# Altium PCB PCB3.PcbDoc
Units mil, origin at the board's own origin, x right, y up, seen from the top; angles counter-clockwise.
Board outline 6000 x 4000 mil, 2 copper layers (Top Layer, Bottom Layer); 55 components, 41 nets, 189 pads, 20 vias.
Unrouted connection lines stored in the file: 6.
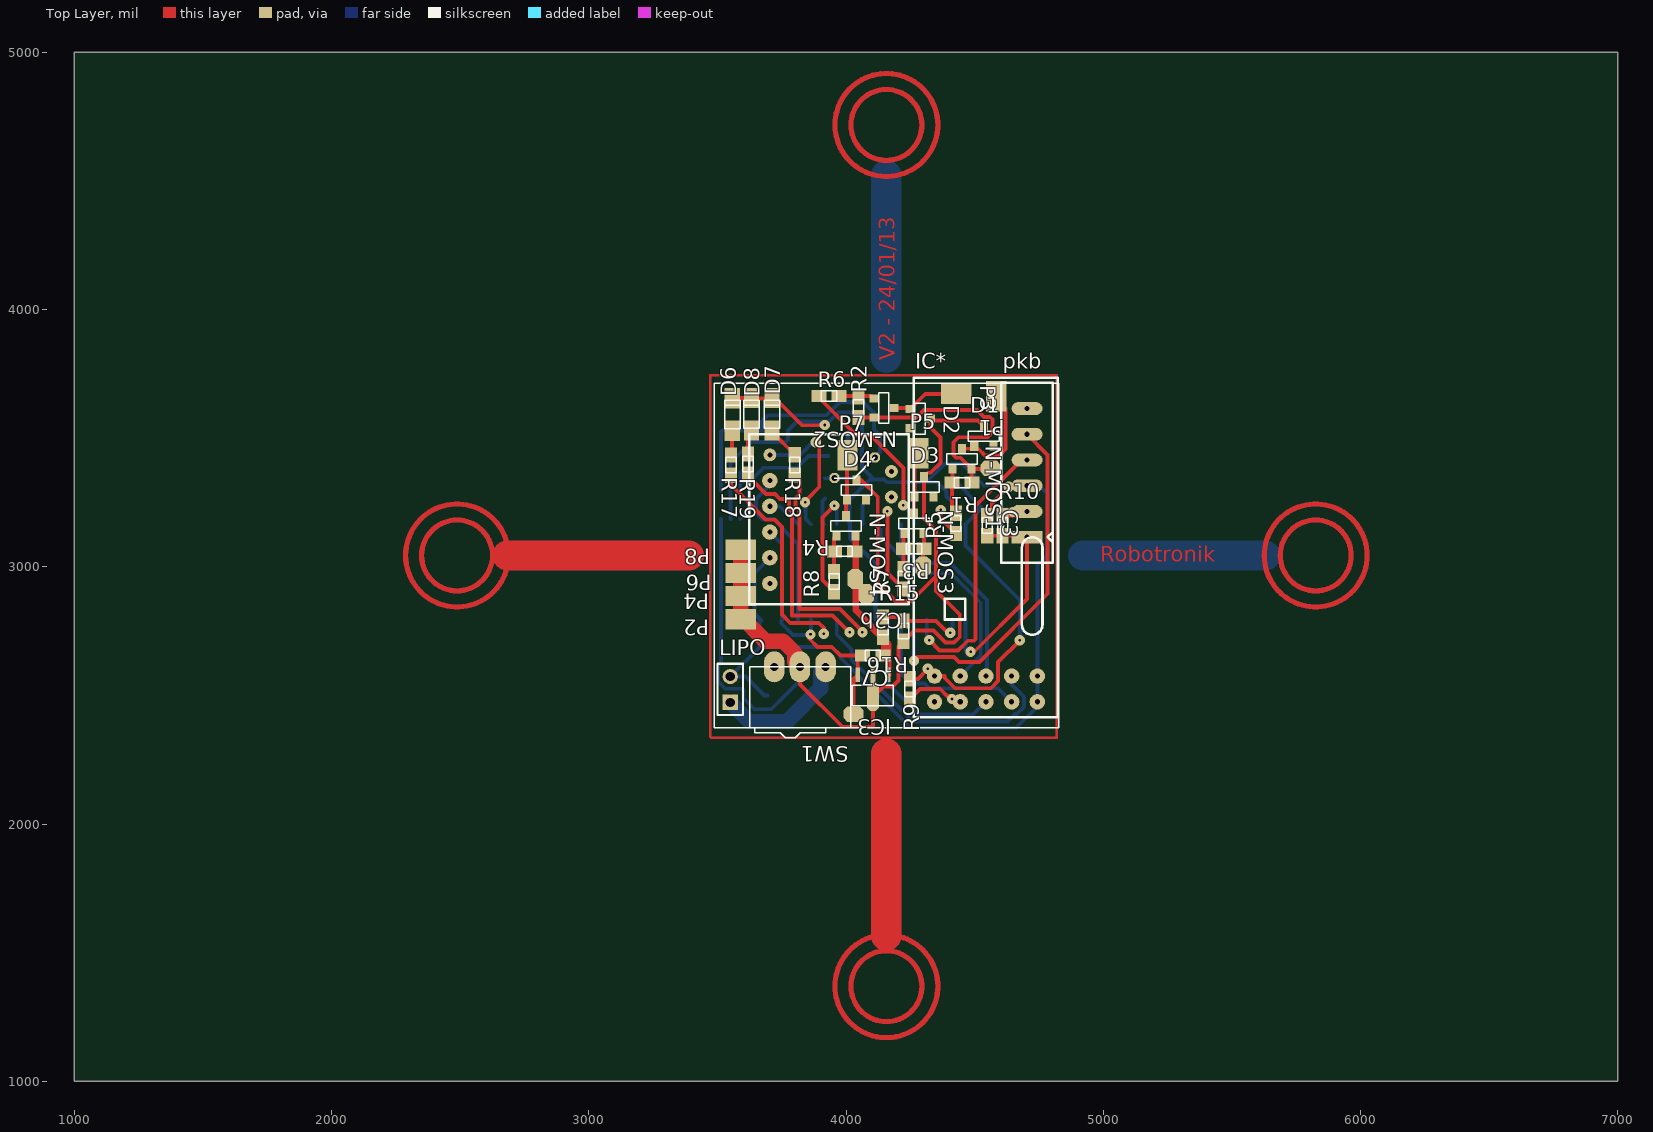
[diagram p0: Top Layer view]
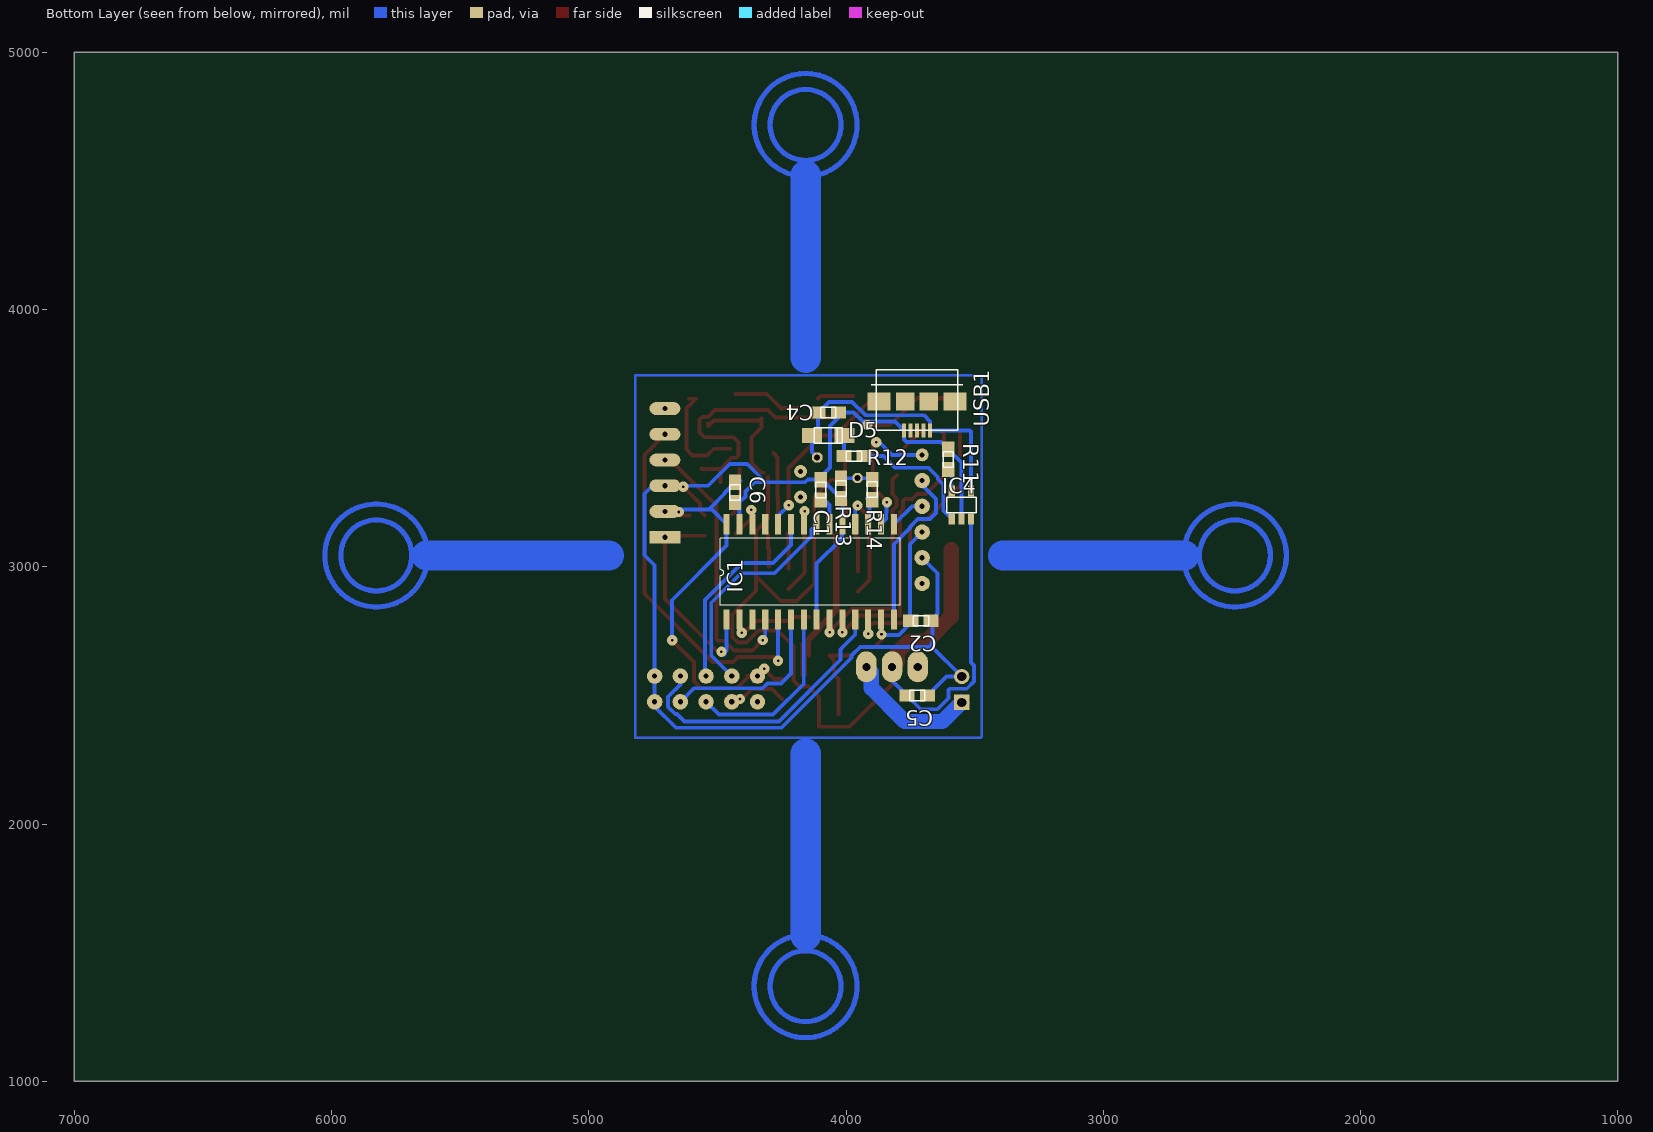
[diagram p1: Bottom Layer view, seen from below]

## Layer stack, top to bottom
Top Layer: signal copper 1.4
Dielectric: dielectric 12.6, FR-4, Dk 4.8
Bottom Layer: signal copper 1.4

## Board outline
1000,1000 7000,1000 7000,5000 1000,5000

## Design rules (kind name [scope] priority, off if disabled: settings)
Clearance [All] p1: gap=10
ComponentClearance [All] p1 off: gap=10 collisioncheckmode=3 verticalgap=10 showdistances=FALSE
PolygonConnect [All] p1: connectstyle=Relief reliefconductorwidth=10 reliefentries=4 polygonreliefangle="90 Angle"
RoutingVias [All] p1: holewidth=10 width=40 viastyle="Through Hole" minholewidth=10 minwidth=40 maxholewidth=10 maxwidth=40
SilkscreenOverComponentPads [All] p1: minsilkscreentomaskgap=10
SolderMaskExpansion [All] p1: expansion=4
Width [All] p1: maxlimit=15 minlimit=15 preferedwidth=15
26 further rules are at their usual default settings.

## Components (designator, comment, footprint, x,y, rotation, side; value= is the part's Value field where it differs from the comment)
C1 "TANTALE 10uf" cms805 4098,3299 r270 bottom
C2 "0.1uf ceramique" cms805 3709,2790 r0 bottom
C3 "1uf" cms805 4549,3160 r270 top
C4 "4.7uF" cms805 4069,3600 r0 bottom
C5 "4.7uF" cms805 3723,2499 r0 bottom
C6 "0.1uf ceramique" cms805 4431,3289 r270 bottom
C7 "1uF" cms805 4104,2655 r180 top
D1 "BAT54" SOT23 4536,3547 r0 top
D2 "BAT54" SOT23 4328,3576 r270 top
D3 "BAT54" SOT23 4303,3350 r0 top
D4 "BAT54" SOT23 4041,3338 r0 top
D5 "LED" cms1206 4069,3510 r180 bottom
D6 "LED" cms1206 3558,3592 r90 top
D7 "LED" cms1206 3712,3593 r90 top
D8 "LED" cms1206 3633,3593 r90 top
IC1 "dsPIC33FJ128MC802" SOIC28(300mil) 4464,2795 r90 bottom
IC2b "MPU6050" MPU6050_drotek 3704,2935 r180 top
IC3 "MCP1700" SOT89 4164,2580 r180 top
IC4 "MCP73831" SOT23-5 3549,3225 r180 bottom
IC* "NRF24L01" NRF24L01 4344,2475 r90 top
LIPO "Header 2" HDR1X2 3550,2473 r90 top
N-MOS1 "FD339" SOT23 4451,3459 r0 top
N-MOS2 "FD339" SOT23 4187,3617 r270 top
N-MOS3 "FD339" SOT23 4265,3208 r0 top
N-MOS4 "FD339" SOT23 4000,3199 r0 top
P1 "pad_moteur" PAD 4584,3663 r180 top
P2 "pad_moteur" PAD 3591,2796 r90 top
P3 "pad_moteur" PAD 4429,3672 r270 top
P4 "pad_moteur" PAD 3591,2886 r90 top
P5 "pad_moteur" PAD 4282,3442 r0 top
P6 "pad_moteur" PAD 3591,2976 r90 top
P7 "pad_moteur" PAD 4006,3434 r0 top
P8 "pad_moteur" PAD 3591,3066 r90 top
pkb "pickit3" pickit3 4704,3115 r90 top
R1 "10k" cms805 4451,3327 r180 top
R2 "10k" cms805 4049,3620 r90 top
R3 "10k" cms805 4264,3070 r180 top
R4 "10k" cms805 3995,3060 r180 top
R5 "330" cms805 4427,3169 r90 top
R6 "330" cms805 3934,3664 r0 top
R7 "330" cms805 4223,2953 r90 top
R8 "330" cms805 3954,2942 r90 top
R9 "10k" cms805 4249,2525 r90 top
R10 "10k" cms805 4609,3160 r90 top
R11 "4.7k" cms805 3602.36,3417.32 r270 bottom
R12 "150" cms805 3969,3430 r0 bottom
R13 "10k" cms805 4019,3305 r90 bottom
R14 "330" cms805 3898,3300 r270 bottom
R15 "17.25k" cms805 4144,2765 r90 top
R16 "4.7k" cms805 4224,2750 r270 top
R17 "65 + test" cms805 3553,3395 r270 top
R18 "65 + test" cms805 3801,3396 r270 top
R19 "65 + test" cms805 3619,3399 r270 top
SW1 "" inverseur 3921,2611 r180 top
USB1 "USB" USB_con 3724,3530 r0 bottom

## Footprints (in the part's own frame and the unit in brackets; to place one, negate y for a bottom-side part, rotate by r counter-clockwise, add the part's x,y. Pads: shape width x height; smd on the part's side, far side on the other; paste and mask are expansions set on the pad)
cms805 [mm]
  rect 1.5x1.2 smd: 1(-1,0) 2(1,0)
  silkscreen extent -0.76,-0.51 0.76,0.51
cms1206 [mm]
  rect 2x1.5 smd: 1(-1.6,0) 2(1.6,0)
  silkscreen extent -1.4,-0.76 1.4,0.76
HDR1X2 [mm] "Connector; Header; 2 Position"
  rect 1.5x1.5 hole 0.9: 1(0,0)
  round 1.5 hole 0.9: 2(2.54,0)
  silkscreen extent -1.27,-1.27 3.81,1.27
inverseur [mil]
  oval 80x120 hole 31.5: 1(0,0) 2(100,0) 3(200,0)
  silkscreen extent -98,0 295,276
MPU6050_drotek [mil]
  round 50 hole 20: 1(0,0) 2(0,-100) 3(0,-200) 4(0,-300) 5(0,-400) 6(0,-500) 7(-472.44,-335.83) 8(-472.44,-435.83)
  silkscreen extent -540,-580 80,80
NRF24L01 [mil]
  round 50 hole 20: 1(0,0) 2(0,-100) 3(0,-200) 4(0,-300) 5(0,-400) 6(100,-400) 7(100,-300) 8(100,-200) 9(100,-100) 10(100,0)
  silkscreen extent -60,-480 1260,80
PAD [mm]
  rect 2x3 smd: 1(0,0)
pickit3 [mil]
  rect 50x120 hole 20: 1(0,0)
  oval 50x120 hole 20: 2(100,0) 3(200,0) 4(300,0) 5(400,0) 6(500,0)
  silkscreen extent -100,-100 600,100
SOIC28(300mil) [mm]
  rect 2x0.6 smd: 1(0,0) 2(0,-1.27) 3(0,-2.54) 4(0,-3.81) 5(0,-5.08) 6(0,-6.35) 7(0,-7.62) 8(0,-8.89) 9(0,-10.16) 10(0,-11.43) 11(0,-12.7) 12(0,-13.97) 13(0,-15.24) 14(0,-16.51) 15(9.4,-16.51) 16(9.4,-15.24) 17(9.4,-13.97) 18(9.4,-12.7) 19(9.4,-11.43) 20(9.4,-10.16) 21(9.4,-8.89) 22(9.4,-7.62) 23(9.4,-6.35) 24(9.4,-5.08) 25(9.4,-3.81) 26(9.4,-2.54) 27(9.4,-1.27) 28(9.4,0)
  silkscreen extent 1.38,-17.14 8,0.63
SOT23 [mm]
  rect 0.8x0.9 smd: 1(-0.95,-2) 2(0,0) 3(0.95,-2)
  silkscreen extent -1.52,-1.52 1.52,-0.51
SOT23-5 [mm]
  rect 0.6x1.1 smd: 1(-1.016,-1.016) 2(-0.066,-1.016) 3(0.884,-1.016) 4(0.884,1.784) 5(-1.016,1.784)
  silkscreen extent -1.52,-0.38 1.4,1.14
SOT89 [mm]
  rect 0.48x1.4 smd: 1(0,0) 3(3,0)
  oct 1.2x2.7 smd: 2(1.5,2.2)
  rect 0.48x2 smd: 2(1.5,0.3)
  silkscreen extent -0.51,1.02 3.56,3.05
USB_con [mm]
  rect 2.3x1.8 smd: 0(-3.75,-2.85) 0(3.75,-2.85)
  rect 1.8x1.8 smd: 0(-1.15,-2.85) 0(1.15,-2.85)
  rect 0.4x1.4 smd: 1(-1.3,0) 2(-0.65,0) 3(0,0) 4(0.65,0) 5(1.3,0)
  silkscreen extent -4.5,-6 4.5,0

## Part data
C1 C2 C3 C4 C5 C6 C7: library part Capa
D1 D2 D3 D4: library part "Schottky BAT54"
IC2b: library part MPU6050-drotek
IC4: library part "MCP73831 Li-Po"
LIPO: "Header, 2-Pin"
N-MOS1 N-MOS2 N-MOS3 N-MOS4: library part "N-MOS FD339"
R1 R2 R3 R4 R5 R6 R7 R8 R9 R10 R11 R12 R13 R14 R15 R16 R17 R18 R19: library part Resistance
SW1: library part switch

## Free pads (board coordinates)
  round 60 hole 10: 0(3704,3335) 1(3704,3235) 2(3704,3135) 3(3704,3035) 4(3704,2935) 5(4344,2575) 6(4444,2575) 7(4544,2575) 8(4644,2575) 9(4744,2575) 10(4744,2475) 11(4644,2475) 12(4544,2475) 13(4444,2475) 14(4344,2475)
  oct 39.37x39.37 hole 23.62: 0(3955,3345) 2(4112,3425)
  oct 59.06x78.74 smd: 1(4036,2952) 1(4079,2893) 2(4300,3001)
  oct 78.74x59.06 smd: 2(4562,3383) 3(4029,2427)

## Via types
v1: diameter 40, hole 10, Top Layer to Bottom Layer, 20 vias

## Nets (pads, with @x,y where several pads share a name; then routed paths per layer and width w, separated by ;. In a path a pad name is that pad's centre, name@x,y a point inside that pad or via, vN(x,y) a via of type N, cw(c..) or ccw(c..) an arc to the next point about the centre after c; other vN are vias at no path point)
GND: C1.1 C2.1 C3.1 C4.1 C5.1 C6.2 C7.1 D6.2 D7.2 D8.2 IC1.8 IC1.19 IC1.27 IC2b.2 IC3.1 IC4.2 IC*.5 IC*.6 LIPO.2 N-MOS1.3 N-MOS2.3 N-MOS3.3 N-MOS4.3 pad.1@4036,2952 pad.1@4079,2893 pad.2@4300,3001 pad.2@4562,3383 pad.3@3704,3035 pad.9 pad.10 pkb.3 R1.1 R2.1 R3.1 R4.1 R11.1 R13.1 R15.1 USB1.5 | length 8506.4
  Top Layer w15: D8.2 3559,3655.99 D6.2 3557,3653.99 3710,3653.99 D7.2 3723.01,3655.99 3829,3550 3916.14,3550 v1(3917.32,3551.18) ; N-MOS4.3 4034.37,3117.23 R4.1 4034.37,2834 R15.1@4143.37,2725 ; R2.1 N-MOS2.3@4107.23,3580.63 ; N-MOS2.3 4273.67,3579.6 4292.78,3598.71 4292.78,3599 4303.03,3609.25 4509.11,3609.25 4535.91,3582.44 4558.77,3582.44 4569.25,3571.97 4569.25,3522.03 4550.69,3503.48 4437.26,3503.48 4417.75,3483.97 4417.75,3434.03 4428,3423.78 4444.88,3423.78 N-MOS1.3 ; C7.1 4143.37,2720.03 R15.1@4143.37,2725 ; R15.1 R15.1@4143.37,2725 ; pad.2@4300,3001 4300,3066.63 R3.1 N-MOS3.3@4303.37,3128.29 ; R1.1@4488.4,3328.97 N-MOS1.3 ; C3.1 4567.88,3218.25 4567.88,3246.4 4636.48,3315 pkb.3 ; pad.2@4562,3383 4559.26,3380.26 N-MOS1.3
  Top Layer w25: N-MOS4.3 4037.4,2831.7 4097.88,2771.23 ; 4106.5,2756.9 4143.37,2720.03 4164,2699.4 IC3.1
  Bottom Layer w15: IC4.2 3551.6,3405.93 R11.1 3630.61,3484.94 3764.71,3484.94 3774.96,3495.19 3774.96,3529.78 USB1.5 3809.45,3564.27 3934.52,3564.27 3970.25,3600 C4.1 4029.63,3580.02 4062.88,3546.78 4062.88,3385.49 C1.1@4109,3339.37 ; C2.1 3671,2791.37 C2.1@3663.68,2798.69 ; C5.1@3680,2499 C5.1 ; C5.1@3694.63,2499 C5.1 ; IC2b.2 3644,2975 3644,2818.37 C2.1@3663.68,2798.69 ; IC1.19 IC1.19@4014,3174 ; IC1.8 4114,3012 4016,3110 4016,3172 IC1.19@4014,3174 ; IC1.27 4414,3250.63 4390.83,3273.8 4390.83,3292.17 4354.67,3328.33 4312,3328.33 ; 3663.68,2701 3676.18,2688.5 3944.82,2688.5 3978.5,2654.82 3978.5,2646.14 4250.63,2374.02 4661.42,2374.02 4744,2456.6 IC*.5 IC*.6 4744,3006 4783,3045 4783,3284 4752,3315 pkb.3 4537,3315 4452,3400 4383.67,3400 4312,3328.33 ; 3663.68,2701 3663.68,2686.68 LIPO.2 3609.63,2573 C5.1 ; 3663.68,2701 C2.1@3663.68,2798.69 ; IC1.19@4014,3174 4014,3260.63 R13.1 4092.74,3339.37 C1.1@4109,3339.37 ; C1.1@4109,3339.37 4147.79,3339.37 4158.84,3328.33 4312,3328.33
  other v1: 4633,3311
NET1: IC1.6 IC*.4 pad.11 | length 700.6
  Bottom Layer w15: IC1.6 4214,2585 4253,2546 4305.82,2546 4324.32,2527.5 4591.5,2527.5 IC*.4 IC*.4@4644,2490
NET2: IC1.7 IC*.3 pad.12 | length 700.3
  Bottom Layer w15: IC1.7 4164,2545 4283.8,2425.2 4494.2,2425.2 IC*.3
NET3: IC1.21 IC*.9 pad.6 | length 869.2
  Bottom Layer w15: IC1.21 4134.69,3144.39 4134.69,3118.46 4278.15,2975 4408.64,2975 4523.62,2860.02 4523.62,2654.62 IC*.9
NET4: IC1.23 IC*.8 pad.7 | length 800.9
  Bottom Layer w15: IC1.23 4214,3085 4284,3015 4404,3015 4548.62,2870.38 4548.62,2579.62 IC*.8
NetC1_2: C1.2 IC1.20 | length 110.9
  Bottom Layer w15: IC1.20 4064,3240.63 C1.2@4089,3265.63
NetC3_2: C3.2 IC1.1 pkb.1 R10.1 | length 864.8
  Top Layer w15: v1@4482,2662 4491,2662 4704,2875 pkb.1 4698.37,3120.63 R10.1 C3.2
  Bottom Layer w15: IC1.1 4464,2675 4472,2667 4472,2658 4483.29,2669.29 v1(4484.25,2669.29)
NetD1_1: D1.1 N-MOS1.2 P1.1 | length 430.4
  Top Layer w15: N-MOS1.2 4514.2,3459 4540.15,3433.04 4553.96,3433.04 4555,3432 4556.04,3433.04 4596.4,3433.04 4620.36,3457 4620.36,3615.64 4583,3653 P1.1@4611,3653
NetD2_1: D2.1 N-MOS2.2 P3.1 | length 262.7
  Top Layer w15: N-MOS2.2 D2.1@4245.66,3617 ; D2.1 4307.86,3672 P3.1
NetD3_1: D3.1 N-MOS3.2 P5.1 | length 240.2
  Top Layer w15: N-MOS3.2 D3.1@4265,3270.66 ; D3.1 4265.6,3425.6 P5.1
NetD4_1: D4.1 N-MOS4.2 P7.1 | length 232.4
  Top Layer w15: N-MOS4.2 D4.1@4000,3255.66 ; D4.1 4003.6,3431.6 P7.1
NetD5_2: D5.2 R12.2 | length 77.6
  Bottom Layer w15: R12.2 D5.2@4008.37,3507.64
NetD6_1: D6.1 R17.1 | length 95.3
  Top Layer w15: R17.1 3557,3438.37 D6.1@3557,3528.01
NetD7_1: D7.1 R18.1 | length 131.5
  Top Layer w15: D7.1 3712,3524.37 R18.1
NetD8_1: D8.1 R19.1 | length 97.4
  Top Layer w15: R19.1 3619,3516.01 D8.1
NetIC1_2: IC1.2 R15.2 R16.1 | length 364.8
  Top Layer w15: R15.2 4209,2804.37 R16.1 4350.5,2789.37 4396.87,2743 v1@4413,2743
  Bottom Layer w15: v1@4413,2743 4413,2734 4414,2735 IC1.2
  other v1: 4404.94,2743
NetIC1_4: IC1.4 pkb.4 | length 1090.7
  Top Layer w15: v1(4324,2715) 4364,2675 4435.97,2675 4473.47,2712.5 4497.57,2712.5 4504,2718.93 4504,3237 4682,3415 pkb.4
  Bottom Layer w15: IC1.4 4314,2725 v1(4324,2715)
NetIC1_5: IC1.5 pkb.5 | length 1456.6
  Top Layer w15: v1(4264,2635) 4278,2649 4420,2649 4439.08,2629.92 4518.92,2629.92 4784,2895 4784,3435 pkb.5
  Bottom Layer w15: v1(4264,2635) IC1.5
NetIC1_9: IC1.9 R18.2 | length 832.4
  Top Layer w15: R18.2 3818.9,3338.73 3818.9,3281.93 3803.5,3266.53 3803.5,3235.47 3818.9,3220.07 3818.9,2836 3976.03,2836 4064,2748.03 v1(4064,2745) v1@4069,2750
NetIC1_10: IC1.10 R19.2 | length 907.4
  Top Layer w15: R19.2 3619,3352.82 3689.32,3282.5 3723.68,3282.5 3742.4,3263.78 3770.22,3263.78 3778.5,3255.5 3778.5,3225.11 3789.64,3213.97 3789.64,2811 3948,2811 v1(4014,2745)
NetIC1_11: IC1.11 IC*.7 pad.8 | length 1113.5
  Bottom Layer w15: IC1.11 3964,2736.32 4016.5,2683.82 ; 4016.5,2682.5 4016.5,2683.82 ; IC*.7 4644,2542.18 4691.5,2494.68 4691.5,2455.32 4663.68,2427.5 4656.6,2427.5 4628.12,2399.02 4260.98,2399.02 4021.5,2638.5 4021.5,2678.82 4016.5,2683.82
NetIC1_12: IC1.12 R17.2 | length 850.1
  Top Layer w15: R17.2 3553,3318.82 3689.32,3182.5 3723.68,3182.5 3751.5,3154.68 3751.5,2813.79 3783.29,2782 3894,2782 3914,2762 v1(3914,2740)
NetIC1_14: IC1.14 IC2b.5 pad.0@3704,3335 | length 658.7
  Bottom Layer w15: IC2b.5 3704,3318.17 3649.61,3263.78 3649.61,3208.66 3673.23,3185.04 3721.14,3185.04 3751.5,3154.68 3751.5,3150.07 3814,3087.57 IC1.14
NetIC1_15: IC1.15 IC2b.4 pad.1@3704,3235 | length 159
  Top Layer w15: IC2b.4 IC2b.4@3724,3235
  Bottom Layer w15: IC2b.4 3744.08,3235 IC1.15
NetIC1_16: IC1.16 IC2b.6 | length 621.7
  Top Layer w15: v1(3841,3251) 3850,3251 3843.9,3257.1 3843.9,3257.9 3896,3310 3896,3498.36 v1(3881.89,3484.25)
  Bottom Layer w15: IC2b.6 3821,3435 3881.89,3495.89 v1(3881.89,3484.25) ; v1(3841,3251) 3850,3251 3843,3244 3843,3212.01 3843.31,3211.7 3843.31,3185.77 IC1.16
NetIC1_17: IC1.17 R14.2 | length 107.6
  Bottom Layer w15: IC1.17 3908,3171.08 3908,3254.63 R14.2@3919,3265.63
NetIC1_18: IC1.18 R8.1 | length 450
  Top Layer w15: R8.1 3954,2903.47 3908.6,2948.87 3908.6,3191.6 v1(3955,3238)
  Bottom Layer w15: v1(3955,3238) 3964,3229 IC1.18
NetIC1_22: IC1.22 R7.1 | length 328.1
  Top Layer w15: v1(4161,3216) 4161,2975.63 R7.1
NetIC1_24: IC1.24 R6.1 | length 666.9
  Top Layer w15: R6.1 3894.63,3657.1 4041.18,3510.56 4096.82,3510.56 4223,3384.37 v1@4223,3257
  Bottom Layer w15: v1(4222,3239) 4264,3197 IC1.24
NetIC1_26: IC1.26 R5.1 | length 115.8
  Top Layer w15: v1(4368,3221) 4368,3188.63 R5.1
NetIC4_1: IC4.1 R12.1 | length 506.5
  Bottom Layer w15: IC4.1 3622.05,3218.05 3622.05,3319.74 3643.48,3341.18 3643.48,3349.48 3679,3385 3809,3385 3854,3430 R12.1
NetIC4_5: IC4.5 R11.2 | length 88.3
  Bottom Layer w15: IC4.5 3589,3364.59 R11.2
NetIC*_2: IC*.2 pad.13 R9.1 | length 231.5
  Top Layer w15: R9.1 4287.76,2524.39 4366.39,2524.39 4392.79,2498 v1@4408,2498
  Bottom Layer w15: v1@4408,2498 4431,2475 IC*.2
  other v1: 4412,2486
NetLIPO_1: LIPO.1 SW1.1 | length 526.8
  Bottom Layer w60: LIPO.1 3550.82,2473 3625.32,2398.5 3771.59,2398.5 3901,2527.91 3901,2591 SW1.1
PWM1: N-MOS1.1 R1.2 R5.2 | length 187.9
  Top Layer w15: N-MOS1.1 4413.6,3328.97 R1.2 4411.63,3234.74 R5.2@4441,3205.37
PWM2: N-MOS2.1 R2.2 R6.2 | length 138.9
  Top Layer w15: R6.2 4098.66,3664 N-MOS2.1
PWM3: N-MOS3.1 R3.2 R7.2 | length 138.8
  Top Layer w15: R7.2 4223,3124.66 N-MOS3.1
PWM4: N-MOS4.1 R4.2 R8.2 | length 142.5
  Top Layer w15: R8.2 3954,3111.66 N-MOS4.1
USB: C4.2 D5.1 IC4.4 pad.0@3955,3345 pad.2@4112,3425 R13.2 R14.1 USB1.1 | length 1202.8
  Bottom Layer w15: IC4.4 3514.2,3525.2 3519.22,3530.22 USB1.1@3673.04,3530.22 ; USB1.1 USB1.1@3673.04,3530.22 ; R14.1@3919,3344.37 R13.2 ; pad.2@4112,3425 4131.99,3444.99 D5.1 4108.37,3533.62 C4.2 4107.53,3600 4066.41,3641.12 3976.01,3641.12 3924.16,3589.27 3697.5,3589.27 3673.04,3564.81 USB1.1@3673.04,3530.22
VBAT: C5.2 D1.2 D2.2 D3.2 D4.2 IC3.2 IC4.3 P2.1 P4.1 P6.1 P8.1 R16.2 SW1.2 | length 4904.1
  Top Layer w15: P2.1 3680,2707 3758.14,2707 ; SW1.2 3821,2543 3986,2378 4104.94,2378 4104.94,2493.39 4146.5,2534.94 4180.7,2534.94 4204,2558.24 4204,2690.63 R16.2 4265.87,2752.5 4339.53,2752.5 4386.53,2705.5 4420.47,2705.5 4442.44,2727.47 4442.44,2814.37 4350.4,2906.41 4350.4,2963.13 ; D4.2 4057.87,3338 4123.5,3272.37 4123.5,2935.23 4192.13,2866.6 4253.87,2866.6 4350.4,2963.13 ; D3.2 4303,3186.87 4350.4,3139.48 4350.4,2963.13 ; D3.2@4318.44,3365.44 4328.62,3365.44 4367,3403.83 4367,3502 4328,3541 D2.2 4334.87,3569.13 4513.87,3569.13 D1.2 D1.2@4536,3557.44
  Top Layer w60: P8.1 P6.1 P4.1 3591,2806 3686,2711 3754.14,2711 3758.14,2707 3801,2664.14 3801,2631 SW1.2
  Bottom Layer w15: IC4.3 3514.2,2627.22 3502.97,2616 3502.97,2553.52 3530.52,2525.97 3598.03,2525.97 3602,2522 3602,2489 3645,2446 3709.37,2446 C5.2 3821,2557.63 SW1.2
VCC: C2.2 C6.1 C7.2 IC1.13 IC1.28 IC2b.3 IC3.3 IC*.1 IC*.10 pad.2@3704,3135 pad.3@4029,2427 pad.5 pad.14 pkb.2 R9.2 R10.2 | length 2764
  Top Layer w15: v1@3857,2720 3888.5,2688.5 3944.82,2688.5 3978.32,2655 C7.2 4045.89,2636.26 IC3.3 4029,2563.11 pad.3@4029,2427 ; R9.2 4279.37,2564.37 v1(4318,2603) ; IC*.10 4383.9,2575 4383.9,2567.93 4424.32,2527.5 4563.68,2527.5 4591.5,2555.32 4591.5,2629.5 v1(4676,2714) ; R10.2 4688.37,3199.37 pkb.2
  Bottom Layer w15: IC2b.3 3751.5,3087.5 3751.5,2793.13 C2.2 3748.37,2780.63 3794,2735 3854,2735 3864,2745 IC1.13 ; C6.1@4409,3334.37 4424.16,3334.37 4472.12,3286.41 4472.12,3283.88 4527.46,3228.54 IC1.28 ; v1(4676,2714) 4676,2870 4464,3082 IC1.28 ; pkb.2 4696,3223 4521.92,3223 IC1.28
  other v1: 3862,2737 4650,3213
pads on no net: D1.3 D2.3 D3.3 D4.3 IC1.3 IC1.25 IC2b.1 IC2b.7 IC2b.8 pkb.6 SW1.3 USB1.0 USB1.2 USB1.3 USB1.4
copper on no net: | length 1417.3
  Bottom Layer w118.11: 4157,3812.9 4157,4521.56 ; 4921.26,3044 5629.92,3044

## Other copper
Top Layer:
  text "V2 - 24/01/13" at 4188.98,3803.15 h60 r90
  text "Robotronik" at 4988.19,3019.68 h60
Multi-Layer:
  circle w20: c5826,3044 r137.79
  circle w20: c5826,3044 r200
  circle w20: c4157,4717.64 r200
  circle w20: c4157,4717.64 r137.79
  circle w20: c2487.98,3044 r200
  circle w20: c2487.98,3044 r137.79
  circle w20: c4157,1369.35 r200
  circle w20: c4157,1369.35 r137.79
  lines w10: 3472.44,2338.58 3476.38,2334.65 4818.9,2334.65 4818.9,3744.09 3472.44,3744.09 3472.44,2338.58
  lines w118.11: 2684,3044 3388,3044 ; 4157,1565.43 4157,2274.09

## Silkscreen, mask and mechanical layers (free items; w line width, h text height)
Top Overlay:
  lines w5: 3955,3345 4032,3345 4112,3425 ; 3488.72,2374.68 4827.31,2374.68 4827.31,2414.06 4827.31,3713.27 3528.09,3713.27 3488.72,3713.27 3488.72,2374.68